# EAGLE board main (EAGLE 9.6.1)
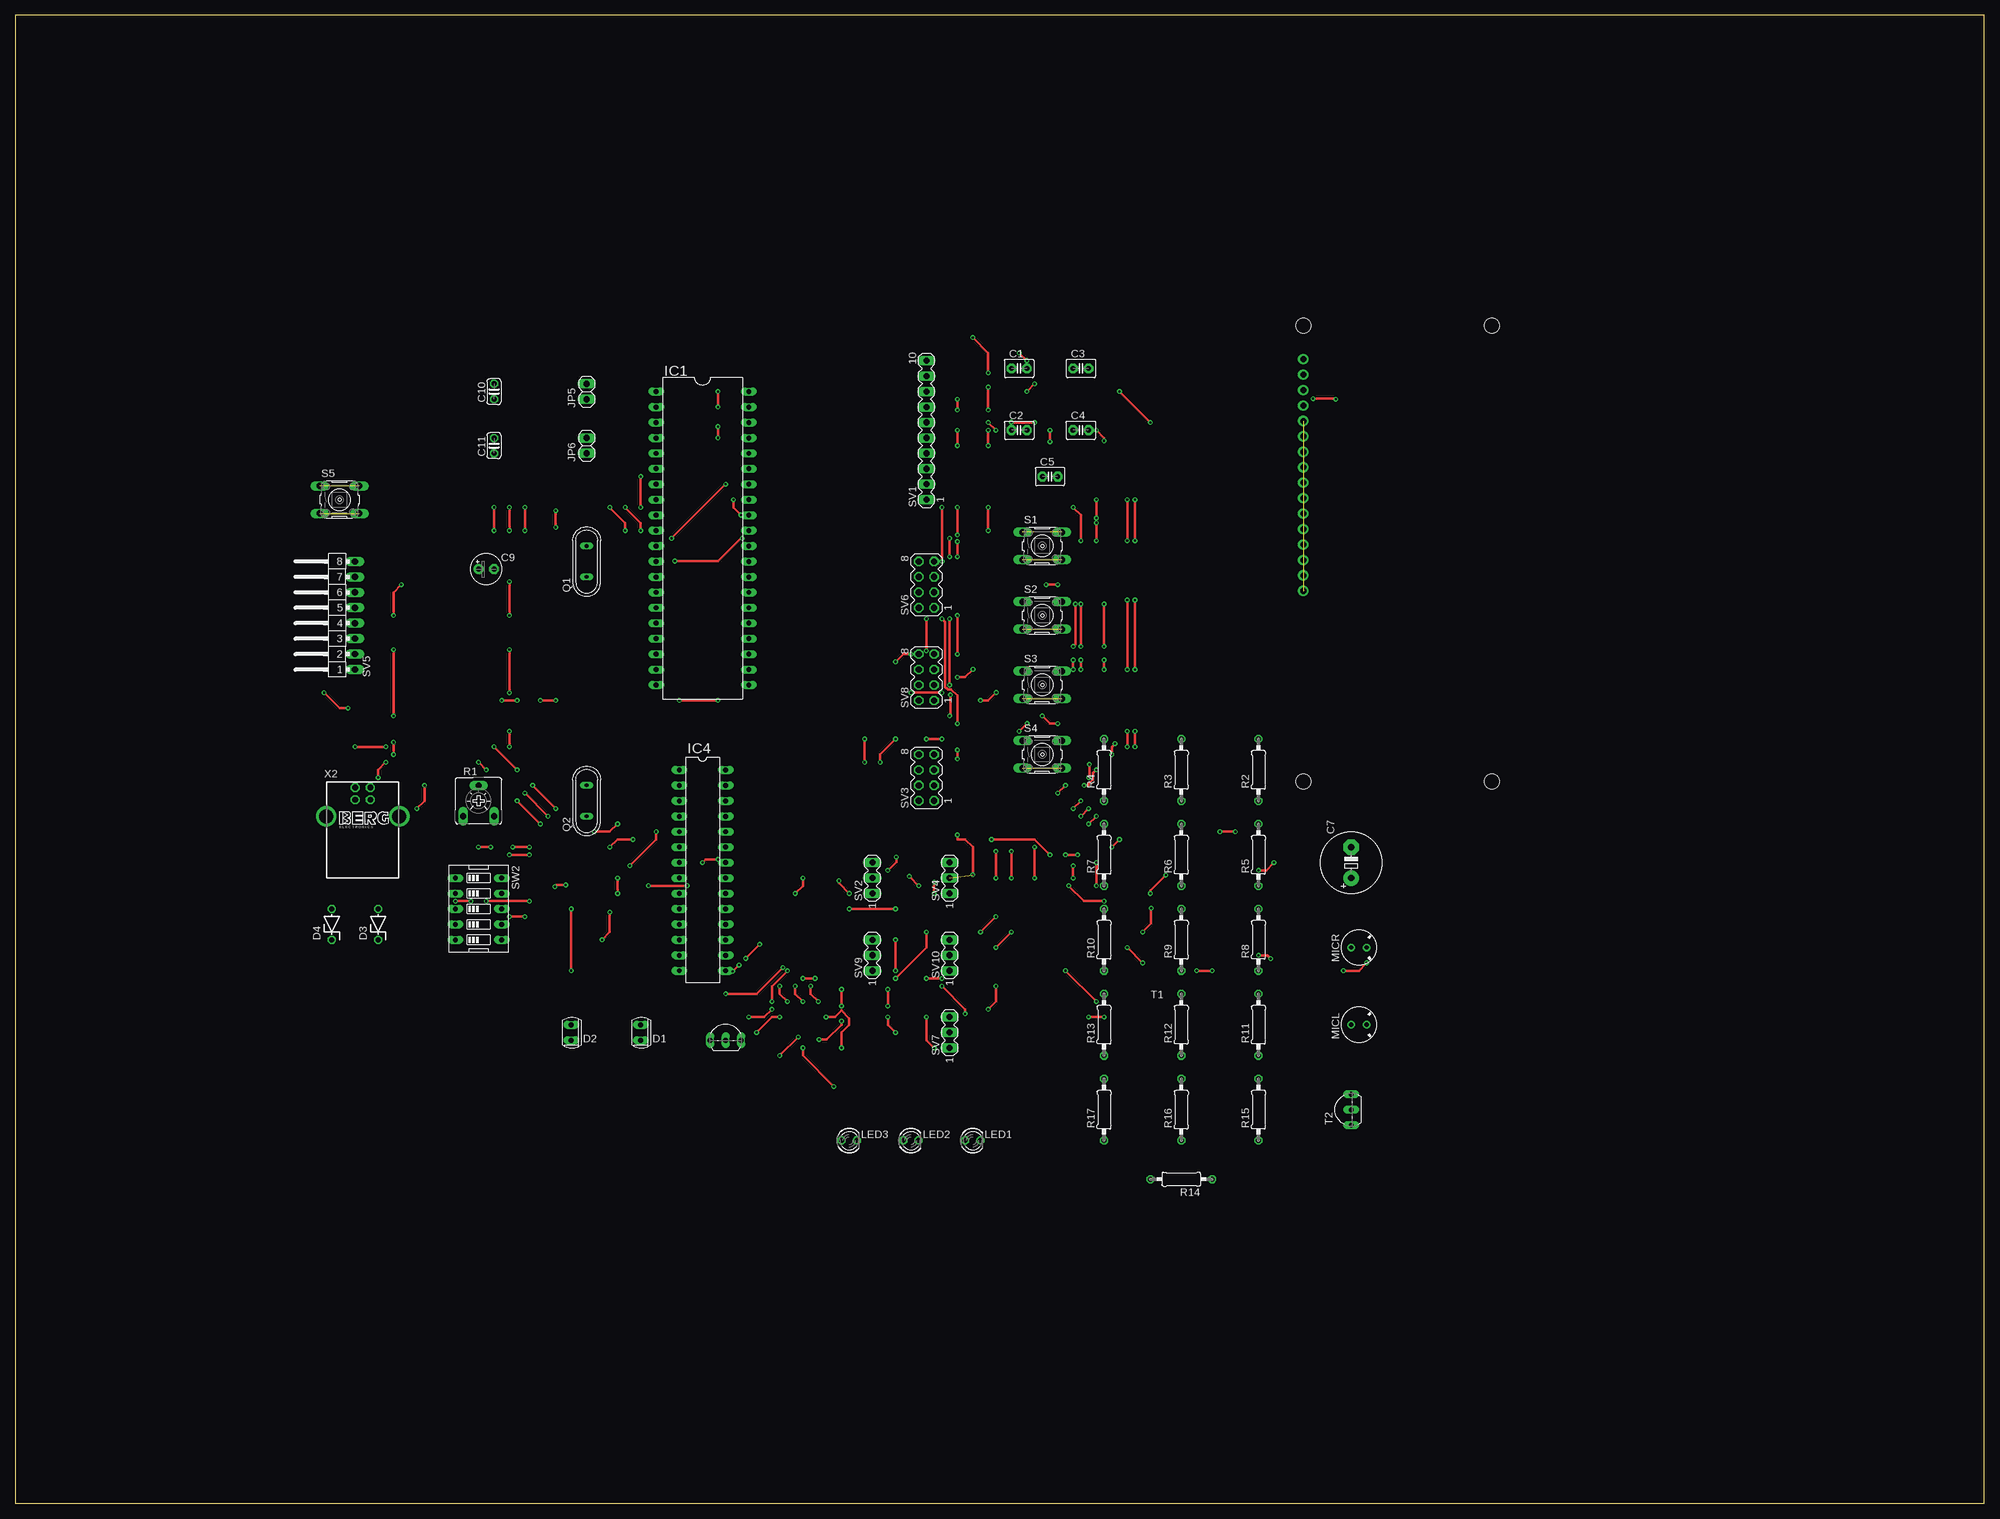
[diagram p0: board, top side]
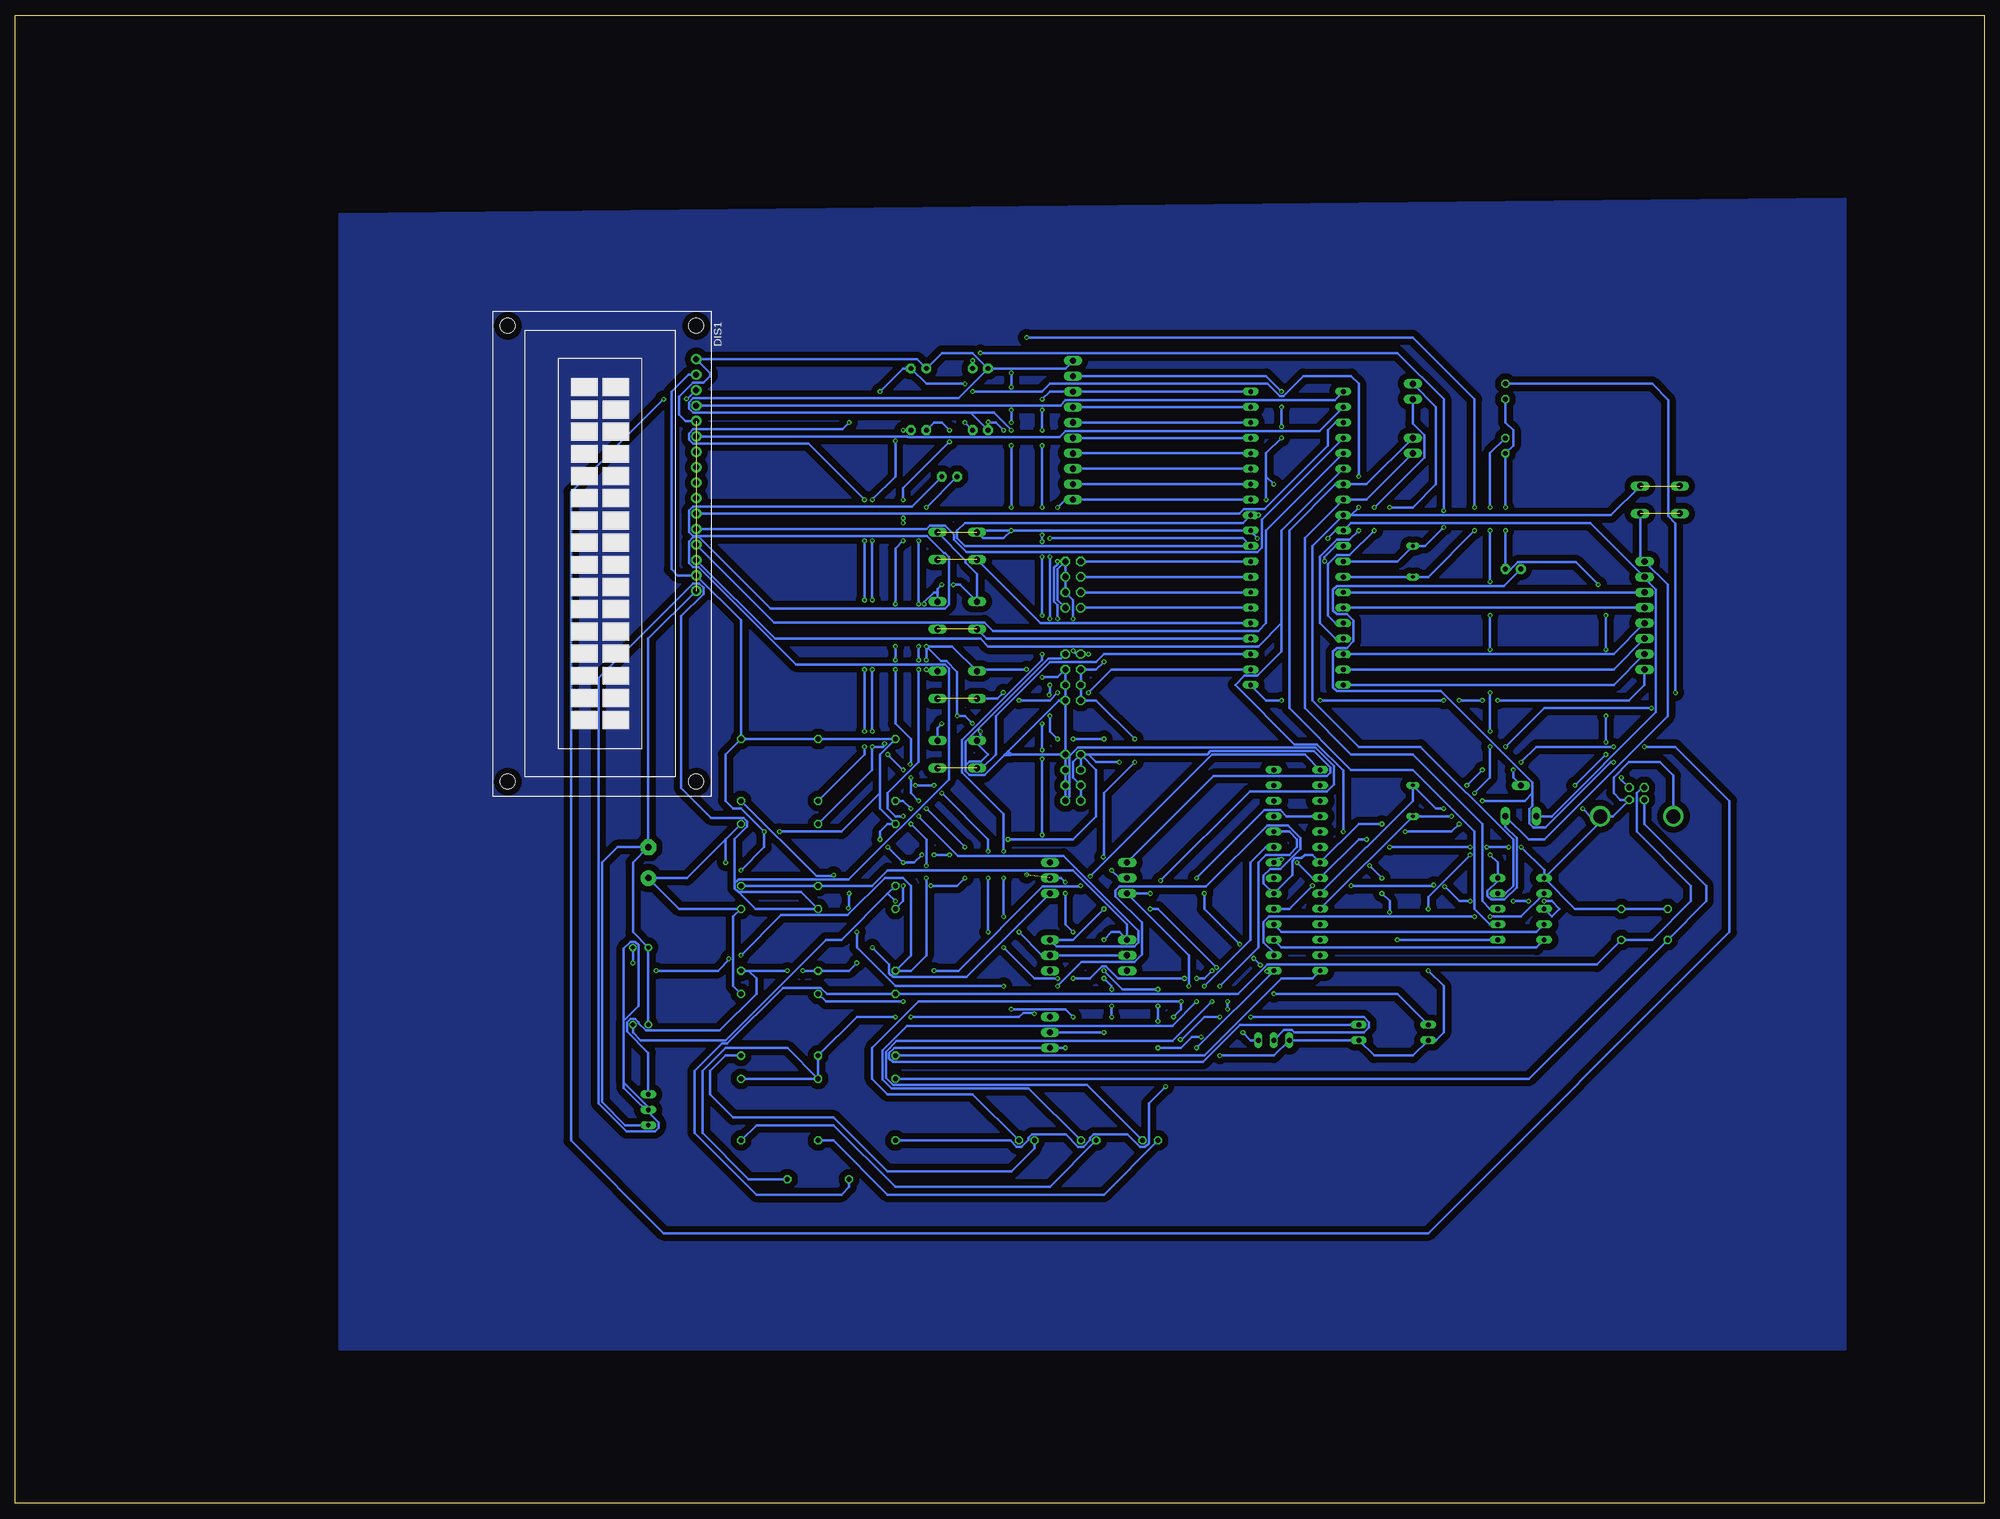
[diagram p1: board, bottom side, seen from below]

Size 323.83 x 244.78 mm. Coordinates in mm from the lower left corner, seen from the top.
Outline: 0,0 323.83,0 323.83,244.78 0,244.78 0,0
Copper layers (1*16): Top 0.035mm / dielectric 1.5mm / Bottom 0.035mm
Design rules "default": minimum track width 6mil, minimum drill 0.35mm, track to track 6mil, track to pad 6mil, pad to pad 6mil, via to via 6mil, smd to smd 6mil, copper to edge 40mil, drill to drill 6mil, minimum pad ring 10mil, minimum via ring 8mil, stop-mask expansion 4mil, vias tented up to drill 0mil, thermal gap 10mil

## Footprints (pad centres in the part's own frame; a part is rotated, then mirrored left to right if it is on the bottom)
C2.5-3 = drill 0.813 pad 1.6 octagon: 1 -1.27,0; 2 1.27,0
E5-10,5 = drill 1.016 pad 2.54: + -2.54,0 | drill 1.016 pad 2.54 octagon: - 2.54,0
E2,5-5 = drill 0.813 pad 1.6: + -1.27,0 | drill 0.813 pad 1.6 octagon: - 1.27,0
C025-024X044 = drill 0.813 octagon: 1 -1.27,0; 2 1.27,0
SFH225 = drill 0.813 long: A 0,1.27; K 0,-1.27
ZDIO-5 = drill 0.813 octagon: A 2.54,0; C -2.54,0
TUXGR_16X2_R2 = drill 1 pad 1.676: 1 -32,15.5; 2 -29.46,15.5; 3 -26.92,15.5; 4 -24.38,15.5; 5 -21.84,15.5; 6 -19.3,15.5; 7 -16.76,15.5; 8 -14.22,15.5; 9 -11.68,15.5; 10 -9.14,15.5; 11 -6.6,15.5; 12 -4.06,15.5; 13 -1.52,15.5; 14 1.02,15.5; 15 3.56,15.5; 16 6.1,15.5 | hole 2.5: -37.5,-15.5; 37.5,-15.5; -37.5,15.5; 37.5,15.5
DIL40 = drill 0.813 long: 1 -24.13,-7.62; 2 -21.59,-7.62; 3 -19.05,-7.62; 4 -16.51,-7.62; 5 -13.97,-7.62; 6 -11.43,-7.62; 7 -8.89,-7.62; 8 -6.35,-7.62; 9 -3.81,-7.62; 10 -1.27,-7.62; 11 1.27,-7.62; 12 3.81,-7.62; 13 6.35,-7.62; 14 8.89,-7.62; 15 11.43,-7.62; 16 13.97,-7.62; 17 16.51,-7.62; 18 19.05,-7.62; 19 21.59,-7.62; 20 24.13,-7.62; 21 24.13,7.62; 22 21.59,7.62; 23 19.05,7.62; 24 16.51,7.62; 25 13.97,7.62; 26 11.43,7.62; 27 8.89,7.62; 28 6.35,7.62; 29 3.81,7.62; 30 1.27,7.62; 31 -1.27,7.62; 32 -3.81,7.62; 33 -6.35,7.62; 34 -8.89,7.62; 35 -11.43,7.62; 36 -13.97,7.62; 37 -16.51,7.62; 38 -19.05,7.62; 39 -21.59,7.62; 40 -24.13,7.62
DIL28-3 = drill 0.813 long: 1 -16.51,-3.81; 2 -13.97,-3.81; 3 -11.43,-3.81; 4 -8.89,-3.81; 5 -6.35,-3.81; 6 -3.81,-3.81; 7 -1.27,-3.81; 8 1.27,-3.81; 9 3.81,-3.81; 10 6.35,-3.81; 11 8.89,-3.81; 12 11.43,-3.81; 13 13.97,-3.81; 14 16.51,-3.81; 15 16.51,3.81; 16 13.97,3.81; 17 11.43,3.81; 18 8.89,3.81; 19 6.35,3.81; 20 3.81,3.81; 21 1.27,3.81; 22 -1.27,3.81; 23 -3.81,3.81; 24 -6.35,3.81; 25 -8.89,3.81; 26 -11.43,3.81; 27 -13.97,3.81; 28 -16.51,3.81
1X02 = drill 1.016 long: 1 -1.27,0; 2 1.27,0
LED3MM = drill 0.813 octagon: A -1.27,0; K 1.27,0
F6050AP = drill 0.7 pad 1.2: 1 0,1.27; 2 0,-1.27
QS = drill 0.61 long: 1 -2.54,0; 2 2.54,0
CA6V = drill 1.016 long: A -2.54,-2.54; E 2.54,-2.54; S 0,2.54
0207/10 = drill 0.813 octagon: 1 -5.08,0; 2 5.08,0
B3F-10XX = drill 1.016 long: 1 -3.251,2.261; 2 3.251,2.261; 3 -3.251,-2.261; 4 3.251,-2.261
MA10-1 = drill 1.016 long: 1 -11.43,0; 2 -8.89,0; 3 -6.35,0; 4 -3.81,0; 5 -1.27,0; 6 1.27,0; 7 3.81,0; 8 6.35,0; 9 8.89,0; 10 11.43,0
MA03-1 = drill 1.016 long: 1 -2.54,0; 2 0,0; 3 2.54,0
MA04-2 = drill 1.016 octagon: 1 -3.81,-1.27; 2 -3.81,1.27; 3 -1.27,-1.27; 4 -1.27,1.27; 5 1.27,-1.27; 6 1.27,1.27; 7 3.81,-1.27; 8 3.81,1.27
MA08-1W = drill 1.016 long: 1 -8.89,0; 2 -6.35,0; 3 -3.81,0; 4 -1.27,0; 5 1.27,0; 6 3.81,0; 7 6.35,0; 8 8.89,0
EDG-05 = drill 0.813 long: 1 -5.08,-3.81; 2 -2.54,-3.81; 3 0,-3.81; 4 2.54,-3.81; 5 5.08,-3.81; 6 5.08,3.81; 7 2.54,3.81; 8 0,3.81; 9 -2.54,3.81; 10 -5.08,3.81
TO92-EBC = drill 0.813 long: B 0,-1.27; C 2.54,-1.27; E -2.54,-1.27
PN61729-S = drill 0.95 octagon: 1 1.25,4.71; 2 -1.25,4.71; 3 -1.25,2.71; 4 1.25,2.71 | drill 2.3 pad 2.9: S1 -6.02,0; S2 6.02,0

## Placement (x,y rotation side)
C1  22p  [C2.5-3]  165.1,186.69 0 top
C2  22p  [C2.5-3]  165.1,176.53 0 top
C3  10nF  [C2.5-3]  175.26,186.69 0 top
C4  100nF  [C2.5-3]  175.26,176.53 0 top
C5  100nF  [C2.5-3]  170.18,168.91 0 top
C7  1000uF/16V  [E5-10,5]  219.71,105.41 90 top
C9  10uF/16V  [E2,5-5]  77.47,153.67 0 top
C10  22pF  [C025-024X044]  78.74,182.88 90 top
C11  22pF  [C025-024X044]  78.74,173.99 90 top
D1  SFH225  [SFH225]  102.87,77.47 0 top
D2  SFH225  [SFH225]  91.44,77.47 0 top
D3  DZ3,6V  [ZDIO-5]  59.69,95.25 90 top
D4  DZ3,6V  [ZDIO-5]  52.07,95.25 90 top
DIS1  TUXGR_16X2_R2  [TUXGR_16X2_R2]  227.33,156.21 270 bottom
IC1  MEGA16-P  [DIL40]  113.03,158.75 270 top
IC4  MEGA8-P  [DIL28-3]  113.03,104.14 270 top
JP5  [1X02]  93.98,182.88 90 top
JP6  [1X02]  93.98,173.99 90 top
LED1  merah  [LED3MM]  157.48,59.69 0 top
LED2  Merah  [LED3MM]  147.32,59.69 0 top
LED3  hijau  [LED3MM]  137.16,59.69 0 top
MICL  MC  [F6050AP]  220.98,78.74 90 top
MICR  MC  [F6050AP]  220.98,91.44 90 top
Q1  8MHz  [QS]  93.98,154.94 90 top
Q2  12MHz  [QS]  93.98,115.57 90 top
R1  20K  [CA6V]  76.2,115.57 0 top
R2  56K  [0207/10]  204.47,120.65 90 top
R3  10K  [0207/10]  191.77,120.65 90 top
R4  56K  [0207/10]  179.07,120.65 90 top
R5  10K  [0207/10]  204.47,106.68 90 top
R6  100K  [0207/10]  191.77,106.68 90 top
R7  10K  [0207/10]  179.07,106.68 90 top
R8  10K  [0207/10]  204.47,92.71 90 top
R9  100K  [0207/10]  191.77,92.71 90 top
R10  10K  [0207/10]  179.07,92.71 90 top
R11  330  [0207/10]  204.47,78.74 90 top
R12  10K  [0207/10]  191.77,78.74 90 top
R13  68  [0207/10]  179.07,78.74 90 top
R14  2K2  [0207/10]  191.77,53.34 180 top
R15  330  [0207/10]  204.47,64.77 90 top
R16  330  [0207/10]  191.77,64.77 90 top
R17  68  [0207/10]  179.07,64.77 90 top
S1  [B3F-10XX]  168.91,157.48 0 top
S2  [B3F-10XX]  168.91,146.05 0 top
S3  [B3F-10XX]  168.91,134.62 0 top
S4  [B3F-10XX]  168.91,123.19 0 top
S5  [B3F-10XX]  53.34,165.1 0 top
SV1  [MA10-1]  149.86,176.53 90 top
SV2  [MA03-1]  140.97,102.87 90 top
SV3  [MA04-2]  149.86,119.38 90 top
SV4  [MA03-1]  153.67,102.87 90 top
SV5  [MA08-1W]  55.88,146.05 90 top
SV6  [MA04-2]  149.86,151.13 90 top
SV7  [MA03-1]  153.67,77.47 90 top
SV8  [MA04-2]  149.86,135.89 90 top
SV9  [MA03-1]  140.97,90.17 90 top
SV10  [MA03-1]  153.67,90.17 90 top
SW2  [EDG-05]  76.2,97.79 270 top
T1  [TO92-EBC]  116.84,77.47 0 top
T2  [TO92-EBC]  218.44,64.77 90 top
X2  PN61729-S  [PN61729-S]  57.15,113.03 0 top

## Library data of the parts
C1-C5 = capacitor-wima
C7 C9-C11 R2-R11 = rcl
D1 D2 = opto-trans-siemens; OC_FARNELL: unknown; OC_NEWARK: unknown
D3 D4 = diode
DIS1 = display-lcd; OC_FARNELL: unknown; OC_NEWARK: unknown
IC1 = atmel; MPN: ATMEGA16-16PU; OC_FARNELL: 9171142; OC_NEWARK: 01M6885
IC4 = atmel
JP5 JP6 = pinhead
LED1-LED3 = led
MICL MICR = microphon
Q1 Q2 SW2 = special
R1 = pot
R12-R17 = resistor
S1-S5 = switch-omron; MPN: B3F-1000; OC_FARNELL: 176432; OC_NEWARK: 36M3542
SV1-SV10 = con-lstb; OC_FARNELL: unknown; OC_NEWARK: unknown
T1 T2 = transistor
X2 = con-berg

## Nets
DGND: C9.- C10.1 C11.1 D3.A D4.A IC4.8 IC4.22 SW2.1 X2.4 X2.S1 X2.S2
GND: C1.1 C2.1 C3.1 C7.- D1.K D2.K DIS1.1 DIS1.5 DIS1.16 IC1.11 IC1.31 LED1.K MICL.1 MICR.1 R1.E S1.1 S1.2 S2.1 S2.2 S3.1 S3.2 S4.1 S4.2 S5.3 S5.4 SV1.10 SV2.1 SV3.1 SV3.3 SV3.5 SV3.7 SV5.8 SV8.1 SV8.3 SV8.5 SV8.7 SW2.10 T1.E T2.E
MISO: IC1.7 JP6.2 SW2.7
MOSI: DIS1.14 IC1.6 SW2.6
N$1: IC1.33 SV1.1 SV4.2 SV7.2
N$2: IC1.34 SV1.2
N$3: IC1.35 SV1.3
N$4: IC1.36 SV1.4
N$5: IC1.37 SV1.5
N$6: IC1.38 SV1.6
N$7: IC1.39 SV1.7
N$8: D2.A R4.1 SV10.3
N$9: IC1.24 S2.3 S2.4
N$10: DIS1.13 IC1.5
N$11: DIS1.12 IC1.4
N$12: DIS1.11 IC1.3
N$13: DIS1.6 IC1.2
N$14: R5.1 R6.1 SV9.3 T1.C
N$15: DIS1.3 R1.S
N$16: C1.2 IC1.12 Q1.2
N$17: C2.2 IC1.13 Q1.1
N$18: DIS1.4 IC1.1
N$19: D1.A R2.1 SV7.1
N$20: IC1.23 S4.3 S4.4
N$21: IC1.40 SV1.8 SV9.2 SV10.2
N$22: C4.2 R6.2 T1.B
N$23: C4.1 MICL.2 R7.1
N$24: R8.1 R9.1 SV4.1 T2.C
N$25: C5.2 R9.2 T2.B
N$26: C5.1 MICR.2 R10.1
N$27: IC1.22 S3.3 S3.4
N$28: IC1.25 S1.3 S1.4
N$30: IC1.21 SV5.1
N$32: IC1.20 SV5.2
N$33: IC1.19 SV5.3
N$34: IC1.18 SV5.4
N$35: IC1.15 SV5.5
N$36: IC1.14 SV5.6
N$37: IC1.16 JP5.2
N$38: IC1.17 JP5.1
N$41: LED1.A R11.1
N$42: IC4.1 R12.2
N$44: IC1.26 SV6.2
N$45: IC1.27 SV6.4
N$46: IC1.28 SV6.6
N$47: IC1.29 SV6.8
N$51: C10.2 IC4.9 Q2.2
N$52: C11.2 IC4.10 Q2.1
N$53: IC4.14 R13.1
N$55: LED2.A R15.1
N$56: LED3.A R16.1
N$57: IC4.23 LED2.K
N$58: IC4.24 LED3.K
N$59: D4.C R17.2 X2.3
N$67: IC4.4 IC4.15 R17.1
N$69: D3.C R13.2 R14.2 X2.2
N$175: IC4.17 SW2.5
N$176: IC4.18 SW2.4
N$177: IC4.19 SW2.3
N$178: IC4.16 SW2.2
RESET: C3.2 IC1.9 R3.1 S5.1 S5.2 SW2.9
SCK: IC1.8 JP6.1 SW2.8
VCC: C7.+ DIS1.2 DIS1.15 IC1.10 IC1.30 IC1.32 R1.A R2.2 R3.2 R4.2 R5.2 R7.2 R8.2 R10.2 R11.2 SV1.9 SV2.3 SV3.2 SV3.4 SV3.6 SV3.8 SV5.7
VDD: SV2.2 SV6.1 SV6.3 SV6.5 SV6.7 SV8.2 SV8.4 SV8.6 SV8.8
VPP: C9.+ IC4.7 IC4.20 R12.1 R14.1 R15.2 R16.2 X2.1

## Tracks (layer width: path | path; a pad name or v marks a point on that pad's centre or on a via)
DGND  (via drill 0.35)
  Top 0.406: v78.74,160.02 v78.74,163.83 | v63.5,151.13 62.23,149.86 v62.23,146.05 | v62.23,140.43 v62.23,129.54 | v62.23,125.19 v62.23,123.19 | v67.31,118.11 67.31,115.57 v66.04,114.3 | v115.57,105.95 113.57,105.95 v113.03,105.41 | v101.6,109.22 99.06,109.22 v97.79,107.95 | v84.55,107.95 v81.82,107.95 | v78.2,107.95 v76.18,107.95
  Bottom 0.406: D4.A D3.A 67.31,97.79 SW2.1 | X2.S2 61.11,113.03 X2.4 59.86,115.74 60.96,116.84 60.96,119.38 58.42,121.92 53.34,121.92 51.13,119.71 X2.S1 | v78.74,160.02 C9.- 77.83,153.67 76.68,154.83 67.2,154.83 v63.5,151.13 | v78.74,163.83 C11.1 77.47,173.99 77.47,176.53 78.74,177.8 C10.1 | SW2.1 63.17,112.09 X2.S2 | v62.23,146.05 v62.23,140.43 62.23,140.26 | v62.23,129.54 v62.23,125.19 62.23,125.02 | v62.23,123.19 v67.31,118.11 | v66.04,114.3 64.77,113.03 X2.S2 | IC4.22 116.13,106.12 115.57,106.12 v115.57,105.95 | v113.03,105.41 110.49,102.87 IC4.8 102.87,109.22 v101.6,109.22 | v97.79,107.95 v84.55,107.95 84.38,107.95 | v81.82,107.95 v78.2,107.95 78.03,107.95 | v76.18,107.95 72.39,104.16 SW2.1
GND  (via drill 0.35)  (3 unrouted)
  Top 0.406: v132.08,82.55 130.81,83.82 v130.81,85.09 | v135.46,102.44 135.46,102.03 v137.16,100.33 | v91.44,97.79 v91.44,87.63 | v81.28,106.68 v84.55,106.68 | v160.02,176.53 v160.02,173.99 | v160.02,163.83 v160.02,160.02 | v135.89,74.93 135.89,77.47 137.16,78.74 137.16,79.81 135.89,81.08 134.82,80.01 v133.35,80.01 | v125.73,73.66 v128.79,76.72 | v157.52,137.2 156.21,135.89 v154.94,135.89 | v171.45,151.13 v169.55,151.13 | v174.35,147.93 174.35,141.33 v173.99,140.97 | v168.91,129.54 170.18,128.27 v171.45,128.27 | v173.99,138.73 v173.99,137.16 | v165.1,127 v166.41,128.31 | v108.49,155 115.63,155 119.38,158.75 v119.56,158.75
  Bottom 0.406: v160.02,160.02 IC1.31 120.65,159.84 v119.56,158.75 | v160.02,160.02 165.38,160.02 S1.1 164.67,158.75 161.29,158.75 v160.02,160.02 | DIS1.16 219.71,142.23 C7.- | DIS1.5 213.61,178.05 214.63,179.07 214.63,182.02 212.32,184.32 210.65,184.32 209.55,185.42 209.55,185.93 DIS1.1 175.51,188.21 C3.1 171.45,189.23 166.37,189.23 C1.1 | MICL.1 MICR.1 222.25,93.98 222.25,105.41 C7.- | C7.- 224.79,107.95 227.33,105.41 227.33,66.04 223.52,62.23 T2.E | S5.4 56.59,155.65 SV5.8 52.07,151.13 52.07,129.54 72.39,109.22 74.93,109.22 R1.E 78.74,111.28 76.91,109.45 76.91,101.33 78.93,99.31 81.09,99.31 81.69,99.91 81.69,100.75 80.01,102.43 SW2.10 80.01,105.41 v81.28,106.68 | SV1.10 151.13,186.69 C1.1 | 166.7,179.4 C2.1 | 166.7,179.4 212.32,179.4 213.02,180.1 213.02,181.08 212.32,181.78 168.74,181.78 C1.1 | LED1.K 166.37,67.31 180.34,67.31 182.88,69.85 182.88,74.93 175.26,82.55 v132.08,82.55 132.08,81.28 v133.35,80.01 | v130.81,85.09 130.81,90.17 SV2.1 v137.16,100.33 | SV8.1 SV8.3 SV8.5 152.4,135.89 v154.94,135.89 | SV8.7 151.84,138.99 153.9,138.99 167.54,125.35 167.54,121.39 | SV8.1 152.17,132.08 160.54,123.71 | 161.06,123.19 160.54,123.71 | SV3.7 SV3.5 SV3.3 SV3.1 150.42,116.28 150.42,122.94 149.05,124.31 109.99,124.31 106.98,121.3 106.98,118.25 108.14,117.09 120.8,117.09 v135.46,102.44 | SV8.1 SV3.7 | v84.55,106.68 91.44,99.79 v91.44,97.79 | v91.44,87.63 88.9,85.09 88.9,77.47 90.17,76.2 D2.K 93.98,73.66 100.33,73.66 D1.K T1.E 116.84,73.66 v125.73,73.66 | v160.02,176.53 162.89,179.4 166.7,179.4 | v160.02,173.99 v160.02,163.83 | v128.79,76.72 130.29,76.72 132.08,74.93 v135.89,74.93
  Bottom 0.406: v157.52,137.2 157.48,137.16 165.38,137.16 S3.1 169.75,140.97 v173.99,140.97 | S1.2 167.54,155.12 167.54,154.76 165.66,152.88 S2.1 168.48,151.13 v169.55,151.13 | S2.2 172.16,149.86 | 172.16,149.86 172.16,150.42 v171.45,151.13 | 172.16,149.86 172.72,149.86 174.35,148.23 v174.35,147.93 | v173.99,140.97 171.58,138.56 170.71,138.56 168.91,136.76 v168.91,129.54 167.64,129.54 v166.41,128.31 | v171.45,128.27 172.16,127.56 S4.2 | v173.99,140.97 v173.99,138.73 173.99,138.56 | v173.99,137.16 173.71,136.88 S3.2 | v165.1,127 165.1,126.01 S4.1 165.66,125.02 163.83,123.19 164.97,122.05 166.88,122.05 167.54,121.39 | IC1.11 106.68,157.48 108.49,155.67 v108.49,155 | 167.54,121.39 167.54,120.47 166.88,119.81 164.43,119.81 161.17,123.07 | 161.06,123.19 160.02,123.19 | 160.02,123.19 SV3.7 | 161.17,123.07 161.06,123.19 | 160.54,123.71 160.02,123.19 | 161.17,123.07 160.14,123.07 160.02,123.19
MAIN
  pour Bottom (isolate 1.016): 22.86,214.63 22.86,25.4 270.51,25.4 270.51,212.09
MISO
  Bottom 0.406: JP6.2 101.6,167.64 IC1.7 106.68,167.64 114.3,160.02 114.3,130.81 104.14,120.65 93.98,120.65 83.82,110.49 83.82,97.79 81.28,95.25 SW2.7
MOSI  (via drill 0.35)
  Top 0.406: v105.41,110.49 105.41,109.22 v101.08,104.89 | v99.06,102.87 v99.06,100.33 | v97.79,97.25 97.79,93.98 v96.52,92.71
  Bottom 0.406: DIS1.14 198.88,142.24 165.1,142.24 163.83,140.97 119.38,140.97 115.57,144.78 | IC1.6 115.57,160.02 115.57,144.78 | 115.57,144.78 115.57,140.14 119.57,136.14 121.67,136.14 123.19,134.62 113.44,124.87 109.76,124.87 105.41,120.52 v105.41,110.49 | v101.08,104.89 v99.06,102.87 | v99.06,100.33 97.79,99.06 v97.79,97.25 97.79,97.08 | v96.52,92.71 SW2.6
N$1  (via drill 0.35)  (1 unrouted)
  Top 0.406: v144.78,77.47 143.51,78.74 v143.51,80.01 | v143.51,81.82 v143.51,84.55 | v144.78,86.36 149.86,91.44 v149.86,93.98 | v151.13,100.33 v151.13,102.18 | v152.4,163.83 152.4,154.94 v152.42,154.94 | v152.4,145.51 152.94,144.98 152.94,134.32 153.37,133.89 153.94,133.89 154.94,132.89 v154.94,128.27 | v154.94,123.92 v154.94,122.46 | v154.94,109.95 154.94,109.22 156.21,109.22 157.48,107.95 157.48,104.14 v157.48,103.41
  Bottom 0.406: IC1.33 SV1.1 151.13,165.1 v152.4,163.83 | SV7.2 v144.78,77.47 | v143.51,80.01 v143.51,81.82 143.51,81.99 | v143.51,84.55 143.51,85.09 v144.78,86.36 | v149.86,93.98 151.13,95.25 v151.13,100.33 | v151.13,102.18 151.82,102.87 SV4.2 | v152.4,145.51 152.4,147.8 152.96,148.36 152.96,153.9 152.42,154.44 v152.42,154.94 | v154.94,128.27 v154.94,123.92 154.94,123.75 | v154.94,122.46 v154.94,109.95 154.94,109.78
N$2
  Bottom 0.406: IC1.34 SV1.2
N$3
  Bottom 0.406: IC1.35 SV1.3
N$4
  Bottom 0.406: IC1.36 SV1.4
N$5
  Bottom 0.406: IC1.37 SV1.5
N$6
  Bottom 0.406: IC1.38 SV1.6
N$7
  Bottom 0.406: IC1.39 SV1.7
N$8  (via drill 0.35)
  Top 0.406: v176.53,114.3 v175.26,113.03 | v116.84,83.82 121.92,83.82 v126.25,88.15 | v137.16,97.79 v144.78,97.79
  Bottom 0.406: R4.1 177.8,115.57 v176.53,114.3 | v175.26,113.03 168.76,106.53 151.46,106.53 139.09,94.16 139.09,92.25 139.75,91.59 152.55,91.59 SV10.3 149.86,92.71 v144.78,97.79 | D2.A 96.52,83.82 v116.84,83.82 | v126.25,88.15 135.89,97.79 v137.16,97.79
N$9  (1 unrouted)
  Bottom 0.406: IC1.24 164.11,142.24 S2.3
N$10
  Bottom 0.406: DIS1.13 199.01,144.91 164.43,144.91 163.04,143.51 119.38,143.51 118.11,144.78 118.11,160.02 IC1.5
N$11
  Bottom 0.406: DIS1.12 173.97,160.27 173.39,160.86 170.94,160.86 169.47,159.39 169.47,158.52 167.41,156.46 119.57,156.46 118.82,157.21 118.82,161.85 IC1.4
N$12
  Bottom 0.406: DIS1.11 122.5,162.81 121.73,163.58 118.36,163.58 107.95,173.99 107.95,176.53 106.68,177.8 IC1.3
N$13
  Bottom 0.406: DIS1.6 177.14,175.51 177.01,175.37 152.09,175.37 151.09,176.38 109.37,176.38 IC1.2
N$14  (via drill 0.35)
  Top 0.406: v121.92,77.47 124.46,80.01 v125.73,80.01 | v132.2,76.32 133.47,76.32 135.89,78.74 v135.89,79.32 | v135.89,81.82 v135.89,84.55 | v144.78,87.63 v144.78,92.71
  Bottom 0.406: R5.1 R6.1 182.88,101.6 180.34,104.14 149.86,104.14 140.97,95.25 SV9.3 142.24,93.98 143.51,93.98 v144.78,92.71 | T1.C 120.65,76.2 v121.92,77.47 | v125.73,80.01 128.27,80.01 132.08,76.2 v132.2,76.32 | v135.89,79.32 v135.89,81.82 135.89,81.99 | v135.89,84.55 141.7,84.55 v144.78,87.63
N$15  (via drill 0.35)
  Top 0.406: v213.45,181.7 217.08,181.7 v217.17,181.61 | v55.88,124.46 v60.96,124.46 | v76.2,121.92 v77.47,120.65
  Bottom 0.406: DIS1.3 213.35,181.61 213.36,181.61 v213.45,181.7 | v217.17,181.61 232.41,166.37 232.41,59.69 217.17,44.45 91.44,44.45 41.91,93.98 41.91,115.57 50.8,124.46 v55.88,124.46 | v60.96,124.46 73.66,124.46 v76.2,121.92 | v77.47,120.65 77.47,119.38 R1.S
N$16  (via drill 0.35)
  Top 0.406: v166.37,187.96 v165.1,189.23 | v88.9,163.29 v88.9,160.56
  Bottom 0.406: IC1.12 96.52,154.94 Q1.2 91.98,157.48 v88.9,160.56 | C1.2 v166.37,187.96 | v165.1,189.23 96.52,189.23 88.9,181.61 v88.9,163.29 88.9,163.12
N$17  (via drill 0.35)
  Top 0.406: v83.82,160.02 v83.82,163.83 | v157.48,191.77 160.02,189.23 v160.02,185.96 | v160.02,177.8 v161.29,176.53 | v163.83,177.86 163.89,177.8 v167.64,177.8 | v160.02,183.61 v160.02,179.86
  Bottom 0.406: Q1.1 IC1.13 91.44,152.4 v83.82,160.02 | v83.82,163.83 83.82,181.61 93.98,191.77 v157.48,191.77 | v160.02,185.96 v160.02,183.61 160.02,183.44 | v160.02,179.86 v160.02,177.8 | v161.29,176.53 162.56,177.8 163.83,177.8 v163.83,177.86 | v167.64,177.8 C2.2
N$18
  Bottom 0.406: DIS1.4 151.95,180.59 151.09,181.46 106.83,181.46 IC1.1
N$19  (via drill 0.35)
  Top 0.406: v189.23,103.35 186.69,100.81 v186.69,100.33 | v186.81,97.91 186.81,95.37 v185.42,93.98 | v161.29,85.09 161.29,82.55 v160.02,81.28 | v149.86,80.01 149.86,76.2 v151.13,74.93
  Bottom 0.406: D1.A 122.4,78.74 128.5,72.64 179.49,72.64 180.09,73.24 180.09,74.08 179.24,74.93 SV7.1 v151.13,74.93 | R2.1 192.07,103.18 189.23,103.18 v189.23,103.35 | v186.69,100.33 186.69,97.79 v186.81,97.91 | v185.42,93.98 185.42,91.44 179.07,85.09 v161.29,85.09 | v160.02,81.28 156.21,81.28 151.13,81.28 v149.86,80.01
N$20  (1 unrouted)
  Bottom 0.406: IC1.23 144.78,139.7 146.05,138.43 153.67,138.43 162.56,129.54 162.56,123.19 164.82,120.93 S4.3
N$21  (via drill 0.35)
  Top 0.406: v154.94,176.53 v154.94,173.99 | v154.94,146.05 v154.94,139.7 | v161.29,107.26 v161.29,102.87 | v161.29,96.52 v158.75,93.98 | v154.94,181.61 v154.94,179.86 | v154.94,163.83 v154.94,159.29 | v154.94,158.21 v154.94,155.73
  Bottom 0.406: IC1.40 SV1.8 153.67,182.88 v154.94,181.61 | v154.94,179.86 v154.94,176.53 | v154.94,173.99 v154.94,163.83 | v154.94,159.29 v154.94,158.21 154.94,158.04 | v154.94,155.73 v154.94,146.05 | v154.94,139.7 154.94,138.74 168.1,125.58 168.1,120.23 161.29,113.43 v161.29,107.26 161.29,107.09 | v161.29,102.87 v161.29,96.52 | v158.75,93.98 154.94,90.17 SV10.2 SV9.2
N$22  (via drill 0.35)
  Top 0.406: v182.88,124.46 v182.88,127 | v182.88,137.16 v182.88,148.59 | v182.88,158.34 v182.88,165.1 | v179.07,174.78 179.07,175.26 v177.8,176.53 | v180.86,124.98 180.34,124.46 v180.34,123.19 | v177.8,120.65 177.26,120.11 177.26,119.08 176.53,118.34 176.53,118.11 v175.8,118.11 | v172.72,118.11 v171.45,116.84 | v163.83,107.26 v163.83,102.87 | v163.83,93.98 v161.29,91.44 | v152.4,86.34 152.38,86.36 v149.86,86.36 | v131.54,86.36 v129.54,86.36 | v127.01,87.62 124.46,85.08 v124.46,82.55 | v124.46,81.28 123.19,80.01 v120.65,80.01
  Bottom 0.406: R6.2 182.88,120.65 v182.88,124.46 181.13,124.46 180.86,124.73 v180.86,124.98 | v182.88,127 v182.88,137.16 | v182.88,148.59 v182.88,158.34 182.88,158.52 | v182.88,165.1 179.07,168.91 v179.07,174.78 179.07,174.95 | v177.8,176.53 C4.2 | v180.34,123.19 v177.8,120.65 | v175.8,118.11 v172.72,118.11 | v171.45,116.84 163.83,109.22 v163.83,107.26 163.83,107.09 | v163.83,102.87 v163.83,93.98 | v161.29,91.44 156.21,86.36 152.4,86.36 v152.4,86.34 | v149.86,86.36 147.09,86.36 145.08,88.36 144.48,88.36 142.47,86.36 v131.54,86.36 131.37,86.36 | v129.54,86.36 128.27,86.36 v127.01,87.62 v127,87.63 | v124.46,82.55 v124.46,81.28 | T1.B 115.16,77.88 113.88,77.88 113.47,77.47 102.04,77.47 101.19,78.32 101.19,79.16 102.04,80.01 v120.65,80.01
N$23  (via drill 0.35)
  Top 0.406: v170.18,176.53 v170.18,174.64 | v179.07,138.73 v179.07,137.16 | v176.65,121.56 176.65,119.5 v176.53,119.38 | v175.26,115.57 v173.99,114.3 | v167.64,107.95 v167.64,102.87 | v173.26,101.6 175.8,99.06 v179.07,99.06 | v177.8,165.1 v177.8,162.08 | v177.8,161.29 v177.8,158.34 | v179.07,147.93 v179.07,140.97
  Bottom 0.406: MICL.2 222.25,77.47 220.98,76.2 207.01,76.2 190.5,92.71 187.96,92.71 180.34,100.33 | R7.1 180.34,100.33 | C4.1 172.72,177.8 171.45,177.8 v170.18,176.53 | v170.18,174.64 177.8,167.02 v177.8,165.1 | v177.8,162.08 v177.8,161.29 | v177.8,158.34 179.07,157.07 v179.07,147.93 179.07,147.75 | v179.07,140.97 v179.07,138.73 179.07,138.56 | v179.07,137.16 179.07,128.27 176.53,125.73 176.53,121.44 v176.65,121.56 | v176.53,119.38 176.53,116.84 v175.26,115.57 | v173.99,114.3 v167.64,107.95 | v167.64,102.87 168.91,101.6 v173.26,101.6 173.43,101.6 | v179.07,99.06 180.34,100.33
N$24  (via drill 0.35)
  Top 0.406: v196.85,87.63 v194.31,87.63 | v185.42,88.9 v182.88,91.44
  Bottom 0.406: T2.C 219.71,74.14 223.21,77.64 223.21,79.14 222.65,79.7 221.85,79.7 221.29,79.14 221.29,78.96 220.11,77.78 207.97,77.78 201.93,83.82 201.93,86.36 203.2,87.63 R8.1 v196.85,87.63 | v194.31,87.63 R9.1 186.69,87.63 v185.42,88.9 | SV4.1 167.39,86.61 179.49,86.61 180.09,87.21 180.09,88.65 v182.88,91.44
N$25
  Bottom 0.406: 205.49,102.02 204.89,102.62 186.78,102.62 170.28,119.11 170.28,137.34 170.94,138 195.43,138 211.43,154 212.32,154 213.02,154.7 213.02,158.22 212.32,158.92 211.34,158.92 199.6,147.19 170.94,147.19 170.28,147.85 170.28,155.68 170.94,156.34 171.1,156.34 173.84,159.08 212.32,159.08 213.02,159.78 213.02,163.3 212.32,164 176.36,164 C5.2 | 205.49,102.02 205.49,101.18 204.89,100.58 | 204.89,100.58 194.56,100.58 R9.2 202.1,97.79 204.89,100.58 | T2.B 219.71,65.21 223.77,69.27 223.77,79.37 221.29,81.85 221.29,91.84 221.85,92.4 222.65,92.4 223.77,91.28 223.77,68.39 218.03,62.65 218.03,61.81 218.63,61.21 223.29,61.21 227.89,65.81 227.89,135.74 212.32,151.3 211.34,151.3 210.64,150.6 210.64,149.62 214.3,145.95 214.3,117.69 209.39,112.78 204.05,112.78 203.45,112.18 203.45,111.34 205.49,109.31 205.49,102.02
N$26  (via drill 0.35)
  Top 0.406: v222.25,88.9 220.98,87.63 v218.44,87.63 | v206.47,89.61 205.91,90.17 v204.47,90.17 | v173.99,163.83 175.26,162.56 v175.26,158.34 | v175.26,147.93 v175.26,140.97 | v175.26,138.73 v175.26,137.16 | v177.8,113.03 v176.53,111.76 | v173.99,104.87 v173.99,102.87
  Bottom 0.406: MICR.2 v222.25,88.9 | v218.44,87.63 208.28,87.63 206.3,89.61 v206.47,89.61 | v204.47,90.17 197.87,96.77 186.92,96.77 180.82,102.87 177.8,102.87 176.53,101.6 176.53,90.17 R10.1 176.53,87.63 173.99,90.17 v173.99,102.87 | C5.1 v173.99,163.83 | v175.26,158.34 v175.26,147.93 175.26,147.75 | v175.26,140.97 v175.26,138.73 175.26,138.56 | v175.26,137.16 175.26,121.92 180.34,116.84 180.34,114.3 179.07,113.03 v177.8,113.03 | v176.53,111.76 173.99,109.22 v173.99,104.87 173.99,104.7
N$27  (via drill 0.35)  (1 unrouted)
  Top 0.406: v161.33,133.39 160.02,132.08 v158.75,132.08 | v152.4,133.35 v147.32,133.35
  Bottom 0.406: IC1.22 143.51,137.16 v147.32,133.35 | S3.3 162.28,132.36 161.29,133.35 v161.33,133.39 | v158.75,132.08 153.67,132.08 v152.4,133.35
N$28  (1 unrouted)
  Bottom 0.406: IC1.25 155.22,144.78 S1.3
N$30  (via drill 0.35)
  Top 0.406: v86.36,132.08 v88.9,132.08 | v80.01,132.08 v82.55,132.08 | v109.22,132.08 v115.57,132.08
  Bottom 0.406: IC1.21 118.11,132.08 v115.57,132.08 | SV5.1 55.88,134.62 58.42,132.08 v80.01,132.08 | v82.55,132.08 v86.36,132.08 | v88.9,132.08 v109.22,132.08
N$32
  Bottom 0.406: SV5.2 60.96,134.62 IC1.20
N$33
  Bottom 0.406: SV5.3 60.96,137.16 IC1.19
N$34
  Bottom 0.406: SV5.4 60.96,139.7 IC1.18
N$35
  Bottom 0.406: SV5.5 IC1.15
N$36
  Bottom 0.406: SV5.6 IC1.14
N$37  (via drill 0.35)
  Top 0.406: v97.79,163.83 100.33,161.29 v100.33,160.02
  Bottom 0.406: JP5.2 90.17,180.34 90.17,167.64 93.98,163.83 v97.79,163.83 | v100.33,160.02 104.39,155.96 106.49,155.96 107.95,154.5 107.95,146.05 106.68,144.78 IC1.16
N$38  (via drill 0.35)
  Top 0.406: v100.33,163.83 102.87,161.29 v102.87,160.02
  Bottom 0.406: JP5.1 93.98,177.6 92.1,175.72 92.1,172.06 v100.33,163.83 | v102.87,160.02 104.39,158.5 106.49,158.5 109.22,155.77 109.22,144.78 106.68,142.24 IC1.17
N$41
  Bottom 0.406: LED1.A 156.21,58.42 160.02,54.61 180.34,54.61 189.23,63.5 205.74,63.5 209.55,67.31 209.55,71.12 207.01,73.66 R11.1
N$42  (via drill 0.35)
  Top 0.406: v177.8,82.55 v172.72,87.63 | v148.59,101.6 v147.04,103.15
  Bottom 0.406: R12.2 190.5,82.55 v177.8,82.55 | v172.72,87.63 168.71,87.63 154.9,101.45 148.74,101.45 v148.59,101.6 | v147.04,103.15 127,123.19 111.76,123.19 IC4.1
N$44
  Bottom 0.406: IC1.26 SV6.2
N$45
  Bottom 0.406: IC1.27 SV6.4
N$46
  Bottom 0.406: IC1.28 SV6.6
N$47
  Bottom 0.406: IC1.29 SV6.8
N$51  (via drill 0.35)
  Top 0.406: v50.8,133.35 53.34,130.81 v54.73,130.81 | v78.74,124.46 v82.55,120.65 | v85.09,118.11 v88.9,114.3
  Bottom 0.406: C10.2 54.61,184.15 51.97,181.51 51.97,162.38 50.8,161.21 v50.8,133.35 | v54.73,130.81 72.39,130.81 v78.74,124.46 | v82.55,120.65 v85.09,118.11 | v88.9,114.3 90.17,114.3 Q2.2 93.98,115.57 IC4.9
N$52  (via drill 0.35)
  Top 0.406: v81.28,163.83 v81.28,160.02 | v81.28,151.61 v81.28,146.05 | v81.28,140.43 v81.28,133.35 | v81.28,127 v81.28,124.46 | v83.82,116.84 v87.63,113.03
  Bottom 0.406: C11.2 81.28,172.72 v81.28,163.83 | v81.28,160.02 v81.28,151.61 81.28,151.44 | v81.28,146.05 v81.28,140.43 81.28,140.26 | v81.28,133.35 v81.28,127 | v81.28,124.46 81.28,119.38 v83.82,116.84 | v87.63,113.03 Q2.1 IC4.10
N$53
  Bottom 0.406: R13.1 128.27,73.66 115.57,86.36 110.49,86.36 IC4.14
N$55
  Bottom 0.406: LED2.A 153.67,52.07 179.07,52.07 189.23,62.23 201.93,62.23 R15.1
N$56
  Bottom 0.406: LED3.A 144.78,50.8 180.34,50.8 189.23,59.69 R16.1
N$57  (via drill 0.35)
  Top 0.406: v129.54,82.55 128.27,83.82 v128.27,85.09
  Bottom 0.406: LED2.K 157.18,68.28 179.72,68.28 181.2,69.76 181.2,74.54 177.16,78.59 133.5,78.59 v129.54,82.55 | v128.27,85.09 120.65,92.71 120.65,105.41 118.11,107.95 IC4.23
N$58  (via drill 0.35)
  Top 0.406: v127,82.55 125.73,83.82 v125.73,85.09
  Bottom 0.406: LED3.K 147.57,68.83 179.49,68.83 180.65,69.99 180.65,74.31 178.91,76.05 133.5,76.05 v127,82.55 | v125.73,85.09 119.38,91.44 119.38,105.41 118.11,106.68 114.3,106.68 113.03,107.95 113.03,109.22 114.3,110.49 IC4.24
N$59
  Bottom 0.406: R17.2 74.93,69.85 D4.C 45.72,99.06 45.72,101.6 55.88,111.76 55.9,111.76 X2.3
N$67  (via drill 0.35)
  Top 0.406: v134.62,68.58 129.54,73.66 v129.54,74.93 | v129.54,102.87 129.54,101.6 v128.27,100.33 | v122.44,91.96 v120.13,89.65 | v119.04,88.56 v118,87.53
  Bottom 0.406: R17.1 160.19,59.69 159.17,58.67 158.33,58.67 157.23,59.78 157.23,60.11 156.63,60.71 151.04,60.71 149.01,58.67 148.17,58.67 147.07,59.78 147.07,60.11 146.47,60.71 140.88,60.71 138.85,58.67 138.01,58.67 137.41,59.27 137.41,65.79 v134.62,68.58 | v129.54,74.93 IC4.15 116.94,87.53 v118,87.53 | IC4.4 114.74,113.03 115.76,114.05 118.36,114.05 v129.54,102.87 | v128.27,100.33 128.27,97.79 v122.44,91.96 122.31,91.84 | v120.13,89.65 v119.04,88.56 118.92,88.44
N$69
  Bottom 0.406: X2.2 56.25,117.74 57.15,116.84 57.15,110.49 48.26,101.6 48.26,99.06 54.61,92.71 D3.C 63.75,88.65 117.92,88.65 122.75,83.82 R13.2 190.33,83.82 191.35,84.84 197.58,84.84 206.78,75.64 207.57,75.64 212.09,71.12 212.09,60.96 201.93,50.8 187.96,50.8 186.69,52.07 R14.2
N$175
  Bottom 0.406: SW2.5 73.66,91.44 115.57,91.44 IC4.17
N$176
  Bottom 0.406: SW2.4 73.66,93.98 115.57,93.98 IC4.18
N$177  (via drill 0.35)
  Top 0.406: v90.55,101.72 89.02,101.72 v88.75,101.45 | v110.49,101.6 v104.14,101.6 | v84.55,99.06 v77.47,99.06 | v74.93,99.06 v72.39,99.06
  Bottom 0.406: IC4.19 114.3,97.79 v110.49,101.6 | v104.14,101.6 90.42,101.6 v90.55,101.72 | v88.75,101.45 86.36,99.06 v84.55,99.06 84.38,99.06 | v77.47,99.06 v74.93,99.06 | v72.39,99.06 71.12,99.06 69.85,97.79 71.12,96.52 SW2.3
N$178  (via drill 0.35)
  Top 0.406: v81.28,96.52 v83.82,96.52
  Bottom 0.406: SW2.2 76.2,96.52 v81.28,96.52 | IC4.16 116.84,90.61 118.52,92.29 118.52,95.67 117.67,96.52 v83.82,96.52
RESET  (via drill 0.35)  (1 unrouted)
  Top 0.406: v184.15,124.46 v184.15,127 | v184.15,137.16 v184.15,148.59 | v184.15,158.34 v184.15,165.1 | v186.69,177.8 v181.61,182.88 | v167.64,184.15 v166.37,182.88 | v102.87,168.91 v102.87,163.83
  Bottom 0.406: IC1.9 61.39,162.56 S5.2 | IC1.9 110.49,157.48 110.49,132.08 102.87,124.46 92.71,124.46 77.47,109.22 77.47,101.6 78.74,100.33 SW2.9 | R3.1 184.15,123.19 v184.15,124.46 | v184.15,127 v184.15,137.16 | v184.15,148.59 v184.15,158.34 184.15,158.52 | v184.15,165.1 193.37,174.32 212.32,174.32 213.02,175.02 213.02,176 212.32,176.7 187.79,176.7 v186.69,177.8 | v181.61,182.88 177.8,186.69 C3.2 173.99,184.15 v167.64,184.15 | v166.37,182.88 154.94,182.88 153.67,184.15 117.88,184.15 115.87,182.15 115.27,182.15 111.99,185.42 104.14,185.42 102.87,184.15 v102.87,168.91 | v102.87,163.83 104.14,162.56 IC1.9
SCK
  Bottom 0.406: JP6.1 101.6,165.1 IC1.8 111.76,158.75 111.76,130.81 104.14,123.19 93.98,123.19 82.55,111.76 82.55,99.06 81.28,97.79 SW2.8
VCC  (via drill 0.35)
  Top 0.406: v115.57,177.11 v115.57,175.26 | v118.11,165.1 118.11,163.83 v119.38,162.56 | v115.57,182.88 v115.57,180.34 | v177.8,101.6 v177.8,105.41 | v180.34,107.95 v181.61,109.22 | v116.84,167.64 v107.95,158.75 | v198.12,110.49 v200.66,110.49 | v207.01,105.41 205.74,104.14 v204.47,104.14 | v160.56,109.22 167.64,109.22 v170.18,106.68 | v172.72,106.68 v174.72,106.68 | v153.67,158.75 v153.67,155.73 | v153.79,132.99 153.79,129.66 v153.67,129.54 | v152.4,125.73 v149.86,125.73 | v144.78,125.73 142.24,123.19 v142.24,121.92 | v153.67,145.51 v153.67,134.62
  Bottom 0.406: R2.2 204.47,145.29 DIS1.15 214.88,152.65 215.9,153.67 215.9,182.88 213.11,185.67 DIS1.2 | R5.2 207.01,109.22 | 207.01,109.22 213.36,102.87 C7.+ 214.63,97.79 R8.2 205.74,96.52 205.74,85.09 R11.2 | R2.2 R3.2 R4.2 181.61,123.19 181.61,116.84 | 181.61,116.84 181.61,114.3 R7.2 180.34,111.76 181.61,110.49 v181.61,109.22 | R2.2 207.01,123.19 207.01,115.57 205.74,114.3 204.47,114.3 v200.66,110.49 200.66,107.95 v204.47,104.14 | R1.A 71.12,113.03 54,130.15 54,150.32 55.88,152.2 SV5.7 64.77,161.29 104.14,161.29 IC1.10 106.68,160.02 v107.95,158.75 | SV1.9 118.11,185.42 v115.57,182.88 | v115.57,180.34 v115.57,177.11 115.57,176.94 | v115.57,175.26 118.11,172.72 118.11,168.91 | 118.11,168.91 v118.11,165.1 | v119.38,162.56 IC1.32 121.92,161.29 167.64,161.29 168.91,160.02 168.91,158.75 167.64,157.48 IC1.30 121.92,158.75 v153.67,158.75 | SV3.8 SV3.6 | SV3.8 149.86,121.92 149.86,119.38 SV3.4 SV3.2 | SV3.8 147.32,123.19 | 147.32,123.19 127.79,123.19 127.23,123.75 110.22,123.75 107.54,121.07 107.54,120.23 108.14,119.63 126.75,119.63 SV2.3 | R10.2 177.8,99.06 v177.8,101.6 | v180.34,107.95 v177.8,105.41 175.99,105.41 v174.72,106.68 | 118.11,168.91 v116.84,167.64 | 181.61,116.84 187.96,110.49 v198.12,110.49 | 207.01,109.22 v207.01,105.41 | SV3.8 146.05,120.65 146.05,113.03 149.86,109.22 154.94,109.22 v160.56,109.22 160.73,109.22 | v170.18,106.68 v172.72,106.68 | v153.67,155.73 v153.67,145.51 153.67,145.34 | v153.67,134.62 153.67,132.87 v153.79,132.99 | v153.67,129.54 153.67,127 v152.4,125.73 | v149.86,125.73 v144.78,125.73 | v142.24,121.92 146.05,121.92 147.32,123.19
VDD  (via drill 0.35)
  Top 0.406: v147.32,139.7 146.05,139.7 v144.78,138.43 | v149.84,140.24 149.86,140.26 v149.86,145.51 | v139.7,125.73 v139.7,121.92 | v144.9,106.32 144.9,105.53 v143.51,104.14
  Bottom 0.406: v147.32,139.7 SV8.8 149.3,139.7 v149.84,140.24 | v144.78,138.43 146.05,137.16 SV8.6 SV8.4 SV8.2 146.05,132.08 v139.7,125.73 | SV6.1 152.4,148.59 152.4,153.67 SV6.7 SV6.5 SV6.3 149.86,148.59 v149.86,145.51 149.86,145.34 | v139.7,121.92 144.78,116.84 144.78,106.2 v144.9,106.32 | v143.51,104.14 142.24,102.87 SV2.2
VPP  (via drill 0.35)
  Top 0.406: v60.96,121.92 59.69,120.65 v59.69,119.38 | v179.07,80.01 v176.53,80.01 | v156.21,80.55 156.21,81.28 v152.4,85.09 | v99.06,111.76 97.79,110.49 v95.25,110.49 | v86.36,111.76 v82.55,115.57
  Bottom 0.406: R16.2 R15.2 | R16.2 R12.1 185.42,80.01 v179.07,80.01 | R16.2 196.85,74.93 207.01,74.93 210.82,71.12 210.82,60.96 203.2,53.34 R14.1 | v60.96,121.92 61.44,121.92 72.21,111.15 74.12,111.15 74.78,111.81 74.78,114.25 74.32,114.71 74.32,116.84 | C9.+ 78.99,150.88 106.49,150.88 107.09,150.28 107.09,146.9 106.49,146.3 104.84,146.3 103.73,145.2 103.73,141.82 104.84,140.72 106.49,140.72 107.09,140.12 107.09,134.2 106.49,133.6 89.35,133.6 74.32,118.57 74.32,116.84 | v59.69,119.38 59.69,119.03 X2.1 | v176.53,80.01 158.75,80.01 158.04,80.72 156.38,80.72 v156.21,80.55 | v152.4,85.09 148.44,89.05 139.75,89.05 138.53,90.27 138.53,95.55 142.85,99.87 142.85,100.79 142.19,101.45 127.98,101.45 117.92,111.51 114.53,111.51 112.47,109.45 112.47,107.68 115.76,104.39 117.41,104.39 118.52,103.29 118.52,102.01 IC4.20 113.76,103.41 113.76,105.71 113.33,106.14 112.3,106.14 111.76,106.68 110.49,106.68 IC4.7 102.87,111.76 v99.06,111.76 | v95.25,110.49 87.63,110.49 v86.36,111.76 | v82.55,115.57 75.59,115.57 74.32,116.84